# EAGLE board Combined MXP board - Copy (EAGLE 7.1.0)
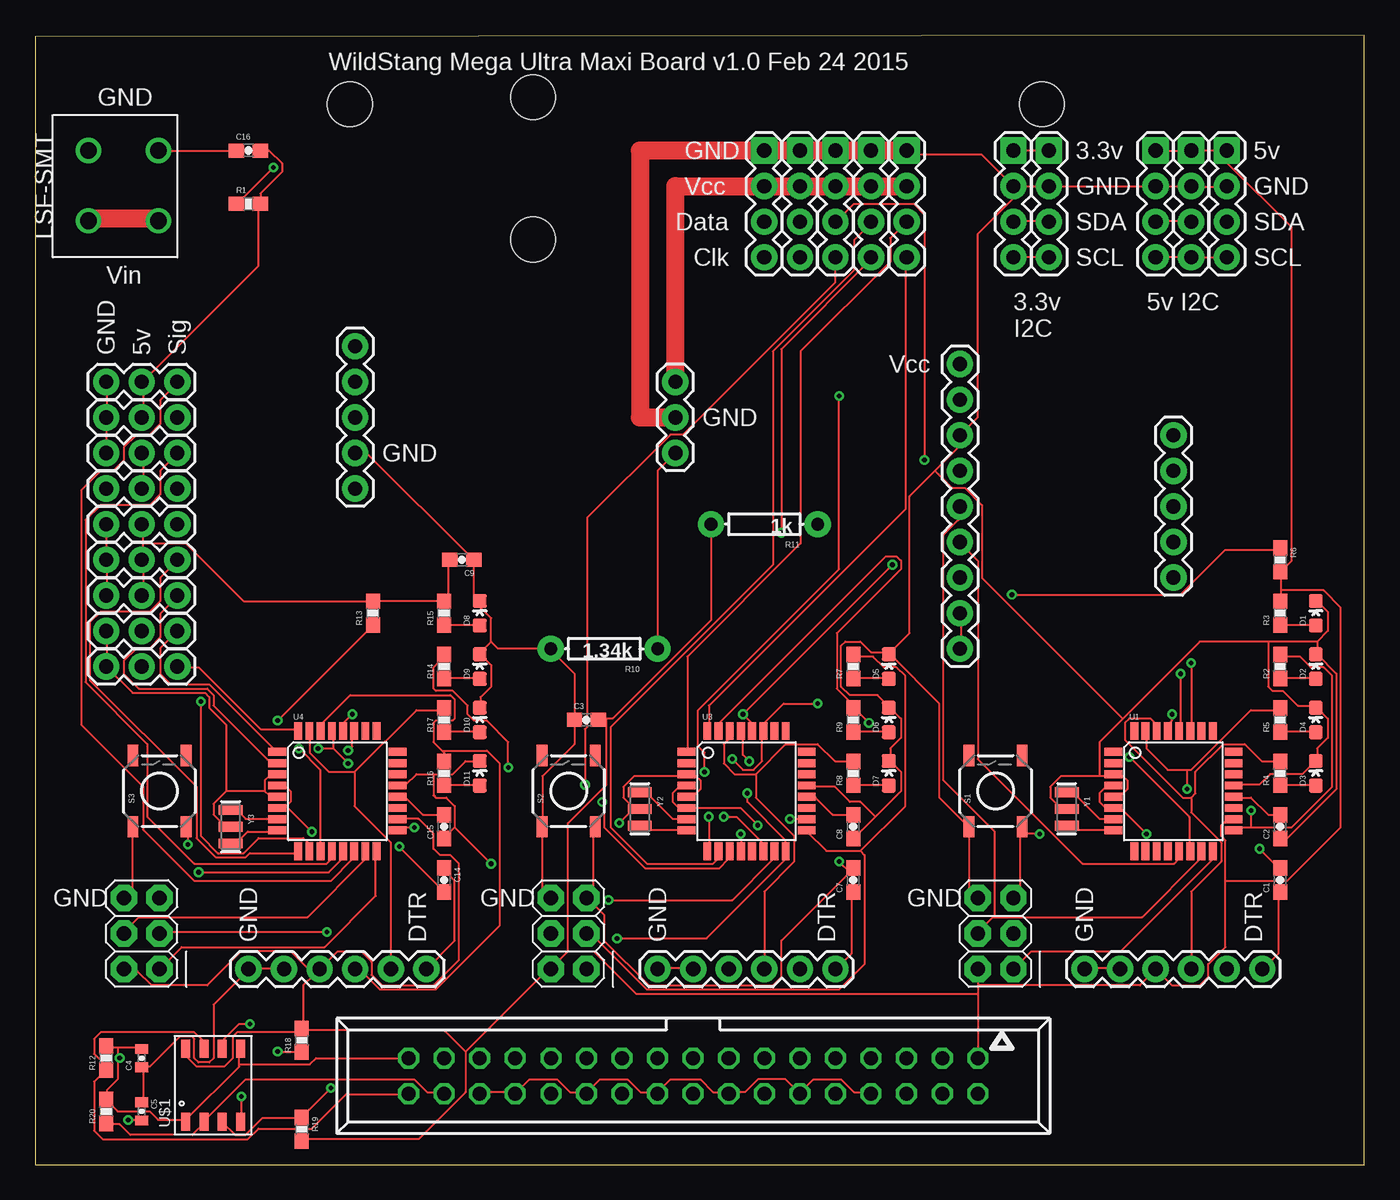
[diagram p0: board, top side]
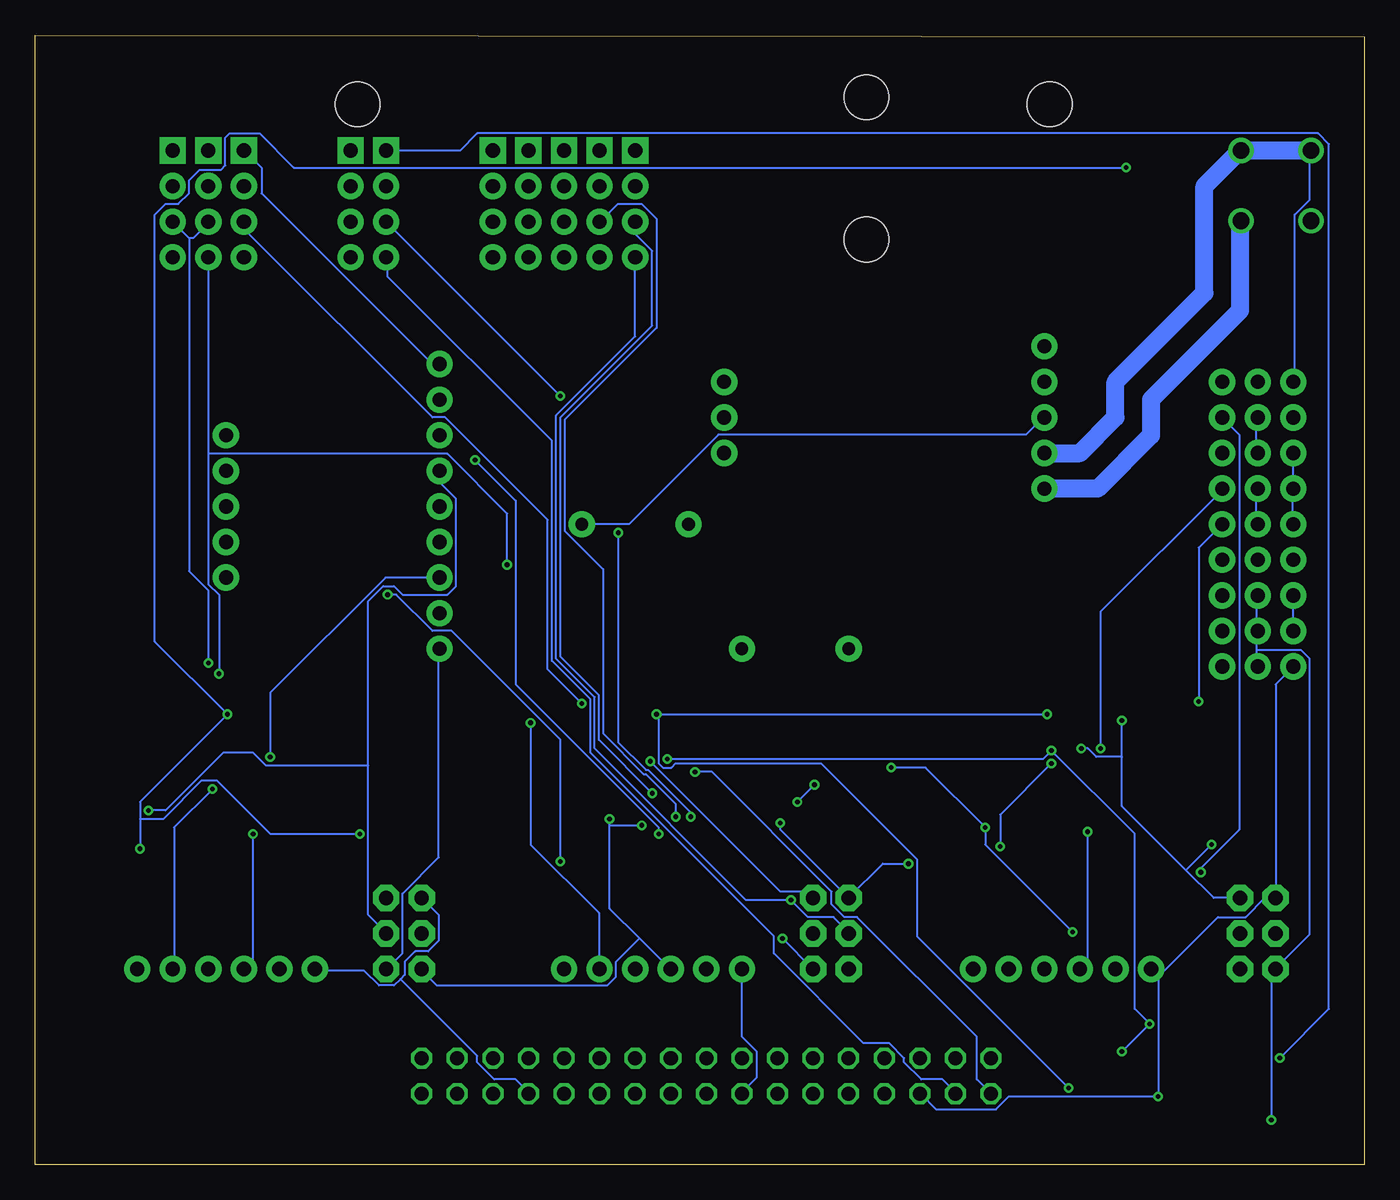
[diagram p1: board, bottom side, seen from below]

Size 94.92 x 80.64 mm. Coordinates in mm from the lower left corner, seen from the top.
Outline: 0,0 94.92,0 94.92,80.64 0,80.51 0,0
Copper layers (1*16): Top 0.0356mm / dielectric 1.5011mm / Bottom 0.0356mm
Design rules "LaenPCBOrder": minimum track width 6mil, minimum drill 13mil, track to track 6mil, track to pad 6mil, pad to pad 6mil, via to via 6mil, smd to smd 6mil, copper to edge 15mil, drill to drill 6mil, minimum pad ring 7mil, minimum via ring 7mil, stop-mask expansion 3mil, vias tented up to drill 0mil, thermal gap 10mil
Holes 3.2 mm at 22.48,75.69 71.88,75.69 35.56,66.04 35.56,76.2

## Footprints (pad centres in the part's own frame; a part is rotated, then mirrored left to right if it is on the bottom)
1X03 = drill 1.016 pad 1.88: 1 0,0; 2 2.54,0; 3 5.08,0
0603-CAP = smd 1.1 x 1: 1 -0.85,0; 2 0.85,0
0402-CAP = smd 0.7 x 0.9: 1 -0.65,0; 2 0.65,0
LED-0603 = smd 1 x 1: A 0,-0.877; C 0,0.877
1X06 = drill 1.016 pad 1.88: 1 0,0; 2 2.54,0; 3 5.08,0; 4 7.62,0; 5 10.16,0; 6 12.7,0
1X04 = drill 1.016 pad 1.88 square: 1 0,0 | drill 1.016 pad 1.88: 2 2.54,0; 3 5.08,0; 4 7.62,0
2X03 = drill 1.016 pad 1.88 octagon: 1 -2.54,-1.27; 2 -2.54,1.27; 3 0,-1.27; 4 0,1.27; 5 2.54,-1.27; 6 2.54,1.27
1X09 = drill 1.016 pad 1.88: 1 0,0; 2 2.54,0; 3 5.08,0; 4 7.62,0; 5 10.16,0; 6 12.7,0; 7 15.24,0; 8 17.78,0; 9 20.32,0
1X05 = drill 1.016 pad 1.88: 1 0,0; 2 2.54,0; 3 5.08,0; 4 7.62,0; 5 10.16,0
0603-RES = smd 1.1 x 1: 1 -0.85,0; 2 0.85,0
AXIAL-0.3 = drill 0.9 pad 1.88: P$1 -3.81,0; P$2 3.81,0
TACTILE_SWITCH_SMD = smd 1.524 x 0.762: 1 -2.54,1.905; 2 2.54,1.905; 3 -2.54,-1.905; 4 2.54,-1.905
TQFP32-08 = smd 1.27 x 0.559: 1 -4.293,2.8; 2 -4.293,2; 3 -4.293,1.2; 4 -4.293,0.4; 5 -4.293,-0.4; 6 -4.293,-1.2; 7 -4.293,-2; 8 -4.293,-2.8; 17 4.293,-2.8; 18 4.293,-2; 19 4.293,-1.2; 20 4.293,-0.4; 21 4.293,0.4; 22 4.293,1.2; 23 4.293,2; 24 4.293,2.8 | smd 0.559 x 1.27: 9 -2.8,-4.293; 10 -2,-4.293; 11 -1.2,-4.293; 12 -0.4,-4.293; 13 0.4,-4.293; 14 1.2,-4.293; 15 2,-4.293; 16 2.8,-4.293; 25 2.8,4.293; 26 2,4.293; 27 1.2,4.293; 28 0.4,4.293; 29 -0.4,4.293; 30 -1.2,4.293; 31 -2,4.293; 32 -2.8,4.293
PCA9512A = smd 1.27 x 0.635: ACC 3.2,-0.7; GND -2,-0.7; SCLIN -2,0.6; SCLOUT -2,1.9; SDAIN 3.2,0.6; SDAOUT 3.2,1.9; VCCH 3.2,3.2; VCCL -2,3.2
LSF-SMT = drill 1.199: 1 0,5.004; 1-2 0,0; 2 5.004,5.004; 2-2 5.004,0
057-034-1 = drill 1 octagon: 1 -20.32,-1.27; 2 -20.32,1.27; 3 -17.78,-1.27; 4 -17.78,1.27; 5 -15.24,-1.27; 6 -15.24,1.27; 7 -12.7,-1.27; 8 -12.7,1.27; 9 -10.16,-1.27; 10 -10.16,1.27; 11 -7.62,-1.27; 12 -7.62,1.27; 13 -5.08,-1.27; 14 -5.08,1.27; 15 -2.54,-1.27; 16 -2.54,1.27; 17 0,-1.27; 18 0,1.27; 19 2.54,-1.27; 20 2.54,1.27; 21 5.08,-1.27; 22 5.08,1.27; 23 7.62,-1.27; 24 7.62,1.27; 25 10.16,-1.27; 26 10.16,1.27; 27 12.7,-1.27; 28 12.7,1.27; 29 15.24,-1.27; 30 15.24,1.27; 31 17.78,-1.27; 32 17.78,1.27; 33 20.32,-1.27; 34 20.32,1.27
RESONATOR-SMD = smd 0.7 x 1.7: 1 -1.2,0; 2 0,0; 3 1.2,0

## Placement (x,y rotation side)
2  [1X03]  10.16,35.56 180 top
3  [1X03]  10.16,38.1 180 top
4  [1X03]  10.16,40.64 180 top
5  [1X03]  10.16,43.18 180 top
6  [1X03]  10.16,45.72 180 top
7  [1X03]  10.16,48.26 180 top
8  [1X03]  10.16,50.8 180 top
9  [1X03]  10.16,53.34 180 top
10  [1X03]  10.16,55.88 180 top
C1  0.1uF  [0603-CAP]  88.9,20.32 90 top
C2  0.1uF  [0603-CAP]  88.9,24.13 90 top
C3  0.1uF  [0603-CAP]  39.37,31.75 0 top
C4  [0402-CAP]  7.62,7.62 90 top
C5  [0402-CAP]  7.62,3.81 270 top
C7  0.1uF  [0603-CAP]  58.42,20.32 90 top
C8  0.1uF  [0603-CAP]  58.42,24.13 90 top
C9  0.1uF  [0603-CAP]  30.48,43.18 180 top
C14  0.1uF  [0603-CAP]  29.21,20.32 270 top
C15  0.1uF  [0603-CAP]  29.21,24.13 90 top
C16  0.1uF  [0603-CAP]  15.24,72.39 0 top
D1  Power  [LED-0603]  91.44,39.37 0 top
D2  D13  [LED-0603]  91.44,35.56 0 top
D3  RX  [LED-0603]  91.44,27.94 0 top
D4  TX  [LED-0603]  91.44,31.75 0 top
D5  D13  [LED-0603]  60.96,35.56 0 top
D6  TX  [LED-0603]  60.96,31.75 0 top
D7  RX  [LED-0603]  60.96,27.94 0 top
D8  Power  [LED-0603]  31.75,39.37 0 top
D9  D13  [LED-0603]  31.75,35.56 0 top
D10  TX  [LED-0603]  31.75,31.75 0 top
D11  RX  [LED-0603]  31.75,27.94 0 top
JP1  FTDI Basic  [1X06]  87.63,13.97 180 top
JP2  [1X04]  80.01,72.39 270 top
JP3  ICSP  [2X03]  68.58,16.51 90 top
JP4  [1X04]  72.39,72.39 270 top
JP5  [1X04]  69.85,72.39 270 top
JP6  [1X04]  85.09,72.39 270 top
JP7  M09  [1X09]  66.04,57.15 270 top
JP8  [1X05]  81.28,52.07 270 top
JP9  [1X04]  82.55,72.39 270 top
JP10  FTDI Basic  [1X06]  57.15,13.97 180 top
JP11  ICSP  [2X03]  38.1,16.51 90 top
JP13  [1X05]  22.86,58.42 270 top
JP15  [1X04]  62.23,72.39 270 top
JP16  [1X04]  59.69,72.39 270 top
JP17  [1X04]  57.15,72.39 270 top
JP18  [1X04]  54.61,72.39 270 top
JP19  [1X04]  52.07,72.39 270 top
JP20  [1X03]  45.72,55.88 270 top
JP21  FTDI Basic  [1X06]  27.94,13.97 180 top
JP22  ICSP  [2X03]  7.62,16.51 90 top
R1  10k  [0603-RES]  15.24,68.58 0 top
R2  10k  [0603-RES]  88.9,35.56 90 top
R3  10k  [0603-RES]  88.9,39.37 90 top
R4  10k  [0603-RES]  88.9,27.94 90 top
R5  10k  [0603-RES]  88.9,31.75 90 top
R6  10k  [0603-RES]  88.9,43.18 270 top
R7  10k  [0603-RES]  58.42,35.56 90 top
R8  10k  [0603-RES]  58.42,27.94 90 top
R9  10k  [0603-RES]  58.42,31.75 90 top
R10  1.34k  [AXIAL-0.3]  40.64,36.83 180 top
R11  1k  [AXIAL-0.3]  52.07,45.72 180 top
R12  10k  [0603-RES]  5.08,7.62 90 top
R13  10k  [0603-RES]  24.13,39.37 90 top
R14  10k  [0603-RES]  29.21,35.56 90 top
R15  10k  [0603-RES]  29.21,39.37 90 top
R16  10k  [0603-RES]  29.21,27.94 90 top
R17  10k  [0603-RES]  29.21,31.75 90 top
R18  10k  [0603-RES]  19.05,8.89 90 top
R19  10k  [0603-RES]  19.05,2.54 270 top
R20  10k  [0603-RES]  5.08,3.81 90 top
S1  Reset  [TACTILE_SWITCH_SMD]  68.58,26.67 90 top
S2  Reset  [TACTILE_SWITCH_SMD]  38.1,26.67 90 top
S3  Reset  [TACTILE_SWITCH_SMD]  8.89,26.67 90 top
U1  ATMEGA328P  [TQFP32-08]  81.28,26.67 0 top
U3  ATMEGA328P  [TQFP32-08]  50.8,26.67 0 top
U4  ATMEGA328P  [TQFP32-08]  21.59,26.67 0 top
U$1  PCA9512A  [PCA9512A]  13.97,5.08 90 top
U$2  LSF-SMT  [LSF-SMT]  3.81,72.39 270 top
X1  057-034-1  [057-034-1]  46.99,6.35 180 top
Y1  16MHz  [RESONATOR-SMD]  73.66,25.4 270 top
Y2  16MHz  [RESONATOR-SMD]  43.18,25.4 270 top
Y3  16MHz  [RESONATOR-SMD]  13.97,24.13 270 top

## Library data of the parts
2-10 JP1-JP11 JP13 JP15-JP22 = SparkFun-Connectors
C1-C3 C7-C9 C14-C16 R1-R9 R12-R20 = SparkFun-Passives
C4 C5 = SparkFun-Capacitors
D1 D2 D4-D6 D8-D10 = SparkFun-LED; PROD_ID: DIO-00819
D3 D7 D11 = SparkFun-LED; PROD_ID: DIO-00821
R10 R11 = SparkFun-Resistors
S1-S3 = SparkFun-Electromechanical; PROD_ID: SWCH-08247
U1 U3 U4 = SparkFun-DigitalIC; PROD_ID: IC-09069
U$1 = TPS5430
U$2 = LSF-SMT
X1 = con-panduit; OC_FARNELL: unknown; OC_NEWARK: unknown
Y1-Y3 = SparkFun-FreqCtrl; PROD_ID: XTAL-08900

## Nets
3V3: JP7.2
A0: U1.23
A1: U1.24
A2: U1.25
A3: U1.26
A6: U1.19
A7: U1.22
AREF: C2.2 U1.20
D2: U1.32
D3: U1.1
D4: U1.2
D5: U1.9
D6: U1.10
D7: U1.11
D8: U1.12
D9: JP7.6 U1.13
D10: JP7.7 U1.14
DTR: C1.1 JP1.1
GND: 2.3 3.3 4.3 5.3 6.3 7.3 8.3 9.3 10.3 C2.1 C3.1 C4.1 C5.1 C8.1 C9.1 C15.1 C16.1 D1.C D2.C D3.C D4.C D5.C D6.C D7.C D8.C D9.C D10.C D11.C JP1.5 JP1.6 JP2.2 JP3.6 JP4.2 JP5.2 JP6.2 JP7.3 JP9.2 JP10.5 JP10.6 JP11.6 JP13.4 JP15.1 JP16.1 JP17.1 JP18.1 JP19.1 JP20.2 JP21.5 JP21.6 JP22.6 R10.P$2 S1.1 S2.1 S3.1 U1.3 U1.5 U1.21 U3.3 U3.5 U3.21 U4.3 U4.5 U4.21 U$1.GND U$2.1 U$2.1-2 X1.8 X1.12 X1.16 X1.20 X1.24 X1.28 X1.30 Y1.2 Y2.2 Y3.2
HE-A0: U4.23
HE-A1: U4.24
HE-A2: U4.25
HE-A3: U4.26
HE-A6: U4.19
HE-A7: U4.22
HE-AREF: C15.2 U4.20
HE-D2: 2.1 U4.32
HE-D3: 3.1 U4.1
HE-D4: 4.1 U4.2
HE-D5: 5.1 U4.9
HE-D6: 6.1 U4.10
HE-D7: 7.1 U4.11
HE-D8: 8.1 U4.12
HE-D9: 9.1 U4.13
HE-D10: 10.1 U4.14
HE-DTR: C14.1 JP21.1
HE-MISO: JP22.1 U4.16
HE-MOSI: JP22.4 U4.15
HE-RESET: C14.2 JP22.5 R13.1 S3.3 U4.29
HE-RXI: JP21.3 R16.2 U4.30
HE-SCK: JP22.3 R14.2 U4.17
HE-TXO: JP21.2 R17.2 U4.31
LED-A1: U3.24
LED-A2: U3.25
LED-A3: U3.26
LED-A6: U3.19
LED-A7: U3.22
LED-AREF: C8.2 U3.20
LED-D2: JP15.4 U3.32
LED-D3: JP15.3 U3.1
LED-D5: JP16.4 U3.9
LED-D6: JP16.3 U3.10
LED-D7: JP17.4 U3.11
LED-D8: JP17.3 U3.12
LED-D9: JP18.4
LED-D10: JP18.3 U3.14
LED-DTR: C7.1 JP10.1
LED-MISO: JP11.1 JP19.3 U3.16
LED-MOSI: JP11.4 JP19.4 U3.15
LED-RESET: C7.2 JP11.5 R6.1 S2.3 U3.29
LED-RXI: JP10.3 R8.2 U3.30
LED-SCK: JP11.3 R7.2 U3.17
LED-TXO: JP10.2 R9.2 U3.31
LED-VCC: JP15.2 JP16.2 JP17.2 JP18.2 JP19.2 JP20.1
MISO: JP3.1 JP7.8 JP7.9 U1.16
MOSI: JP3.4 JP7.5 U1.15
N$1: U1.7 Y1.1
N$2: U1.8 Y1.3
N$3: D1.A R3.1
N$4: D2.A R2.1
N$5: D3.A R4.1
N$6: D4.A R5.1
N$7: U3.7 Y2.1
N$8: U3.8 Y2.3
N$9: D5.A R7.1
N$10: D6.A R9.1
N$11: D7.A R8.1
N$12: JP20.3 R10.P$1
N$13: U3.13
N$14: JP13.3 R11.P$1
N$19: U4.7 Y3.1
N$20: U4.8 Y3.3
N$21: D8.A R15.1
N$22: D9.A R14.1
N$23: D10.A R17.1
N$24: D11.A R16.1
RESET: C1.2 JP3.5 R1.1 S1.3 U1.29
RXI: JP1.3 R4.2 U1.30
SCK: JP3.3 JP7.4 R2.2 U1.17
SCL: JP2.4 JP6.4 JP9.4 R19.1 U1.28 U3.28 U4.28 U$1.SCLIN
SCL3.3: JP4.4 JP5.4 R20.1 U$1.SCLOUT X1.32
SDA: JP2.3 JP6.3 JP9.3 R18.1 U1.27 U3.27 U4.27 U$1.SDAIN
SDA3.3: JP4.3 JP5.3 R12.1 U$1.SDAOUT X1.34
TXO: JP1.2 R5.2 U1.31
VCC: 2.2 3.2 4.2 5.2 6.2 7.2 8.2 9.2 10.2 C3.2 C5.2 C9.2 C16.2 JP1.4 JP2.1 JP3.2 JP6.1 JP7.1 JP9.1 JP10.4 JP11.2 JP21.4 JP22.2 R1.2 R3.2 R6.2 R11.P$2 R13.2 R15.2 R18.2 R19.2 U1.4 U1.6 U1.18 U3.4 U3.6 U3.18 U4.4 U4.6 U4.18 U$1.VCCH X1.1
VCC3.3: C4.2 JP4.1 JP5.1 R12.2 R20.2 U$1.ACC U$1.VCCL X1.33
VIN: JP13.5 U$2.2 U$2.2-2

## Tracks (layer width: path | path; a pad name or v marks a point on that pad's centre or on a via)
AREF
  Top 0.152: C2.2 88.8,24.99 88.04,24.99 86.82,26.21 85.6,26.21 U1.20
D9
  Top 0.152: U1.13 81.64,22.25 81.64,21.79 81.33,21.49 74.78,21.49 67.31,28.96 67.31,43.13 66.09,44.35 JP7.6
D10  (via drill 0.33)
  Top 0.152: v78.13,29.11 82.4,24.84 82.4,22.4 U1.14
  Bottom 0.152: v78.13,29.11 78.13,33.68 69.9,41.91 JP7.7
DTR
  Top 0.152: C1.1 88.8,19.36 88.8,15.09 87.73,14.02 JP1.1
GND  (via drill 0.33)
  Top 0.152: JP5.2 69.9,69.8 72.34,69.8 JP4.2 72.49,69.8 79.96,69.8 JP2.2 80.11,69.8 82.55,69.8 | 82.55,69.8 84.99,69.8 JP6.2 | 82.55,69.8 JP9.2 | JP5.2 67.61,72.08 62.74,72.08 JP15.1 | 28.45,27.89 27.23,27.89 26.47,27.13 26.01,27.13 U4.21 | 28.45,27.89 29.82,27.89 30.73,28.8 31.65,28.8 D11.C | 29.97,24.08 29.21,23.32 C15.1 | 29.97,24.08 29.97,25.6 29.36,26.21 28.6,26.21 28.45,26.36 28.45,27.89 | U3.5 46.58,26.36 47.04,26.36 47.5,26.82 47.5,27.43 47.19,27.74 46.58,27.74 U3.3 46.43,27.74 42.77,27.74 42.01,26.98 42.01,26.21 42.77,25.45 | 42.77,25.45 43.08,25.45 Y2.2 42.77,25.45 | JP11.6 36.22,19.66 36.22,24.08 S2.1 36.22,24.23 36.22,27.74 38.51,30.02 38.51,31.7 C3.1 38.51,31.85 38.51,35.05 36.83,36.73 R10.P$2 36.83,36.88 33.02,36.88 32.56,37.34 | v41.71,24.38 42.77,25.45 | v32.56,21.49 29.97,24.08 | D10.C 31.8,32.77 31.8,33.38 32.56,34.14 32.56,35.66 31.8,36.42 D9.C 31.8,36.58 32.56,37.34 | 32.56,37.34 32.56,39.01 31.8,39.78 31.8,40.23 D8.C 31.65,40.39 31.34,40.69 31.34,43.13 C9.1 31.19,43.28 23.72,50.75 22.96,50.75 JP13.4 | JP22.6 6.96,19.66 6.96,24.08 S3.1 | C5.1 7.72,4.57 7.72,6.86 C4.1 7.72,7.01 8.18,7.01 10.31,9.14 11.23,9.14 11.38,8.99 11.38,7.62 11.68,7.32 12.45,7.32 12.75,7.62 12.75,11.43 15.19,13.87 JP21.6 15.34,14.02 17.78,14.02 JP21.5 | v14.73,4.88 14.73,3.2 U$1.GND | 16.41,26.67 16.71,26.36 17.17,26.36 U4.5 | 16.41,26.67 16.41,27.43 16.71,27.74 17.17,27.74 U4.3 | 13.67,26.67 12.75,25.76 12.75,24.99 13.51,24.23 13.97,24.23 Y3.2 | 16.41,26.67 13.67,26.67 | 3.3 5.13,38.1 5.13,35.66 2.3 6.96,33.68 12.14,33.68 12.45,33.38 12.45,32.61 13.67,31.39 13.67,26.67
  Top 0.152: U$2.1 C16.1 | 5.13,53.34 5.13,55.78 10.3 | 4.3 5.13,40.69 5.13,43.13 5.3 5.13,43.28 5.13,45.72 6.3 | 5.13,53.34 5.13,50.9 8.3 | 5.13,53.34 9.3 | U1.21 85.6,27.13 87.43,27.13 88.19,27.89 90.48,27.89 91.39,28.8 D3.C 91.54,28.96 91.54,29.72 92.3,30.48 92.3,31.85 91.54,32.61 D4.C 91.39,32.77 90.17,32.77 89.1,33.83 88.34,33.83 88.04,34.14 88.04,37.34 | U1.5 77.06,26.36 77.52,26.36 77.98,26.82 77.98,27.43 77.67,27.74 77.06,27.74 U1.3 76.91,27.74 76,27.74 | 76,27.74 73.25,27.74 72.49,26.98 72.49,26.21 73.25,25.45 73.56,25.45 Y1.2 | 91.54,37.34 91.54,36.58 D2.C 91.54,36.42 92.91,35.05 92.91,26.82 89.41,23.32 88.95,23.32 C2.1 | 91.54,37.34 92.3,38.1 92.3,39.47 91.54,40.23 D1.C | 76,27.74 76,30.18 77.67,31.85 | 77.67,31.85 83.16,37.34 88.04,37.34 | 91.54,37.34 88.04,37.34 | D5.C 60.91,36.58 59.69,36.58 58.93,37.34 57.86,37.34 57.56,37.03 57.56,34.14 58.17,33.53 60.15,33.53 60.91,32.77 D6.C 61.06,32.61 61.82,31.85 61.82,30.48 61.06,29.72 61.06,28.96 D7.C 61.06,28.8 61.82,28.04 61.82,26.67 60,24.84 | 60,24.84 58.47,23.32 C8.1 | 60,24.84 58.93,25.91 58.17,25.91 57.1,26.98 55.12,26.98 U3.21 | 64.26,49.53 62.43,47.7 62.43,37.95 61.06,36.58 D5.C | 64.26,49.53 65.94,51.21 65.94,51.97 JP7.3 67.31,53.34 67.31,66.45 69.75,68.89 69.75,69.8 JP5.2 | 77.67,31.85 67.61,41.91 67.61,47.09 66.4,48.31 65.48,48.31 64.26,49.53 | JP1.6 74.93,14.02 77.37,14.02 JP1.5 | JP3.6 66.7,19.66 66.7,24.08 S1.1 66.55,24.23 64.57,26.21 64.57,32.92 61.06,36.42 D5.C | X1.8 59.69,5.18 58.47,5.18 57.56,6.1 55.58,6.1 54.66,5.18 X1.12 53.59,6.1 51.61,6.1 50.7,5.18 49.63,5.18 X1.16 49.48,5.18 48.41,5.18 47.5,6.1 45.36,6.1 44.45,5.18
  Top 0.152: JP10.6 44.45,14.02 46.89,14.02 JP10.5 | X1.30 31.8,5.18 34.24,5.18 X1.28 35.31,6.1 37.29,6.1 38.2,5.18 39.27,5.18 X1.24 39.42,5.18 40.34,6.1 42.32,6.1 43.23,5.18 44.45,5.18 | 44.45,5.18 X1.20
  Top 1.27: JP15.1 JP16.1 JP17.1 JP18.1 JP19.1 43.18,72.39 43.18,53.34 JP20.2
  Bottom 0.152: v41.71,24.38 41.71,23.93 JP11.6 34.39,21.49 v32.56,21.49 | 14.73,13.41 v14.73,4.88 25.4,4.88 26.31,3.96 30.58,3.96 31.65,5.03 X1.30 | 14.73,13.41 15.19,13.87 JP21.6 14.73,13.41 | 14.73,13.41 10.46,17.68 8.48,17.68 7.11,19.05 JP22.6 6.35,34.29 2.3 | 8.3 5.13,50.75 5.13,48.31 7.3 5.13,48.16 5.13,45.72 6.3 | U$2.1-2 3.91,72.39 3.91,68.89 4.98,67.82 4.98,55.93 10.3 | 3.3 5.13,38.1 5.13,40.54 4.3 | 68.83,13.26 68.53,13.56 68.53,14.48 67.77,15.24 66.85,15.24 66.09,16 66.09,17.83 JP3.6 | 68.83,13.26 69.29,12.8 70.36,12.8 71.42,13.87 74.93,13.87 JP1.6 | JP10.6 44.45,9.14 43.38,8.08 43.38,6.25 44.45,5.18 X1.20 | 68.83,13.26 63.35,7.77 63.35,7.32 62.13,6.1 60.6,6.1 59.69,5.18 X1.8
  Bottom 1.27: 3.91,72.39 U$2.1 8.89,72.39 11.43,69.85 11.43,62.23 17.78,55.88 17.78,53.34 20.32,50.8 JP13.4
HE-AREF
  Top 0.152: C15.2 29.21,24.99 27.69,24.99 26.47,26.21 26.01,26.21 U4.20
HE-D2
  Top 0.152: U4.32 18.69,31.09 16.1,31.09 11.68,35.51 10.16,35.51 2.1
HE-D3
  Top 0.152: 3.1 8.94,36.88 8.94,35.05 9.7,34.29 12.45,34.29 17.17,29.57 U4.1
HE-D4
  Top 0.152: U4.2 17.17,28.8 16.71,28.8 12.75,32.77 12.75,33.53 12.29,33.98 7.42,33.98 6.35,35.05 6.35,35.97 7.26,36.88 8.18,36.88 8.94,37.64 8.94,39.32 10.16,40.54 4.1
HE-D5
  Top 0.152: U4.9 18.69,22.25 15.34,22.25 15.04,21.95 12.9,21.95 11.53,23.32 11.53,26.98 3.91,34.59 3.91,38.71 4.67,39.47 8.18,39.47 8.94,40.23 8.94,41.91 10.16,43.13 5.1
HE-D6  (via drill 0.33)
  Top 0.152: v11.84,33.07 11.84,23.47 13.06,22.25 14.88,22.25 15.95,23.32 19.15,23.32 19.46,23.01 19.46,22.4 U4.10
  Bottom 0.152: v11.84,33.07 11.84,44.04 6.1
HE-D7  (via drill 0.33)
  Top 0.152: v18.85,29.72 20.37,28.19 20.37,22.4 U4.11
  Bottom 0.152: v18.85,29.72 18.85,39.47 10.16,48.16 7.1
HE-D8
  Top 0.152: U4.12 21.13,22.25 21.13,21.79 20.83,21.49 11.38,21.49 8.03,24.84 8.03,30.02 3.61,34.44 3.61,46.02 4.67,47.09 8.18,47.09 8.94,47.85 8.94,49.53 10.16,50.75 8.1
HE-D9  (via drill 0.33)
  Top 0.152: v11.68,20.88 20.98,20.88 21.9,21.79 21.9,22.25 U4.13
  Bottom 0.152: v11.68,20.88 11.68,21.18 8.94,23.93 8.94,52.12 9.1
HE-D10
  Top 0.152: U4.14 22.66,22.25 22.66,21.79 21.13,20.27 11.38,20.27 7.72,23.93 7.72,26.98 3.3,31.39 3.3,48.16 4.67,49.53 5.59,49.53 6.35,50.29 6.35,51.21 7.26,52.12 8.18,52.12 8.94,52.88 8.94,54.56 10.16,55.78 10.1
HE-DTR
  Top 0.152: JP21.1 29.97,16 29.97,20.27 29.21,21.03 C14.1
HE-MISO
  Top 0.152: JP22.1 10.46,15.54 20.68,15.54 24.33,19.2 24.33,22.25 U4.16
HE-MOSI
  Top 0.152: U4.15 23.57,22.25 23.57,21.79 19.46,17.68 7.42,17.68 6.35,16.61 JP22.4
HE-RESET  (via drill 0.33)
  Top 0.152: v26.01,22.71 29.21,19.51 C14.2 | 21.28,29.72 v22.35,28.65 | 21.28,29.72 21.28,30.94 U4.29 | v17.32,31.7 24.03,38.41 R13.1 | v10.92,22.86 10.92,24.08 S3.3 | v20.22,29.72 21.28,29.72
  Bottom 0.152: v26.01,22.71 26.01,24.99 v22.35,28.65 | 17.32,29.11 17.32,25.6 12.75,21.03 | 17.32,29.11 v17.32,31.7 | 12.75,21.03 10.77,19.05 JP22.5 | 12.75,21.03 v10.92,22.86 | v20.22,29.72 19.76,29.72 19.15,29.11 17.32,29.11
HE-RXI
  Top 0.152: R16.2 29.21,29.41 29.06,29.57 | 29.06,29.57 28.45,30.18 28.45,31.55 28.6,31.7 29.82,31.7 29.97,31.85 29.97,33.22 29.67,33.53 22.5,33.53 20.52,31.55 20.52,31.09 U4.30 | 29.06,29.57 32.26,29.57 33.17,28.65 33.17,17.07 28.6,12.5 24.64,12.5 23.27,13.87 22.96,13.87 JP21.3
HE-SCK  (via drill 0.33)
  Top 0.152: v33.78,28.35 33.78,30.18 32.26,31.7 31.34,31.7 30.89,32.16 30.89,32.77 29.82,33.83 28.6,33.83 28.45,33.98 28.45,35.51 29.21,36.27 R14.2 | v27.08,24.08 26.16,24.08 26.01,23.93 U4.17 | v20.83,16.61 8.94,16.61 JP22.3
  Bottom 0.152: v33.78,28.35 31.34,28.35 v27.08,24.08 27.08,22.86 v20.83,16.61
HE-TXO
  Top 0.152: 22.81,28.04 27.23,32.46 29.21,32.46 R17.2 | 22.81,28.04 20.98,28.04 19.61,29.41 19.61,30.94 U4.31 | JP21.2 25.4,23.01 22.81,25.6 22.81,28.04
LED-AREF
  Top 0.152: C8.2 58.32,24.99 56.95,24.99 55.73,26.21 55.12,26.21 U3.20
LED-D2
  Top 0.152: U3.32 48.11,31.09 48.11,32.77 62.13,46.79 62.13,64.77 JP15.4
LED-D3
  Top 0.152: JP15.3 61.06,66.14 61.06,64.47 54.66,58.06 54.66,44.35 46.58,36.27 46.58,29.57 U3.1
LED-D5  (via drill 0.33)
  Top 0.152: v48.11,24.84 48.11,22.4 U3.9 | v53.29,45.11 53.29,58.22 59.69,64.62 JP16.4
  Bottom 0.152: v48.11,24.84 48.11,25.15 51.16,28.19 51.31,28.19 53.29,30.18 v53.29,45.11
LED-D6
  Top 0.152: U3.10 48.72,22.25 48.72,21.79 48.41,21.49 43.69,21.49 41.1,24.08 41.1,31.24 52.68,42.82 52.68,58.06 58.47,63.86 58.47,65.99 59.69,67.21 JP16.3
LED-D7  (via drill 0.33)
  Top 0.152: v40.49,25.91 40.64,25.76 40.64,24.08 43.54,21.18 48.87,21.18 49.48,21.79 49.48,22.25 U3.11 | v39.27,27.13 39.27,31.09 39.42,31.24 39.42,46.18 45.36,52.12 46.28,52.12 57.1,62.94 57.1,64.77 JP17.4
  Bottom 0.152: v39.27,27.13 v40.49,25.91
LED-D8  (via drill 0.33)
  Top 0.152: v50.39,23.62 50.39,22.4 U3.12 | v63.5,50.29 63.5,67.82 62.74,68.58 58.47,68.58 57.25,67.36 JP17.3
  Bottom 0.152: v50.39,23.62 50.39,24.08 60.6,34.29 60.6,47.4 v63.5,50.29
LED-D10  (via drill 0.33)
  Top 0.152: v49.17,24.84 50.09,24.84 51.92,23.01 51.92,22.4 U3.14
  Bottom 0.152: v49.17,24.84 49.17,25.76 51.31,27.89 51.46,27.89 54.36,30.79 54.36,42.52 57.1,45.26 57.1,53.19 50.55,59.74 50.55,67.51 51.61,68.58 53.29,68.58 54.51,67.36 JP18.3
LED-DTR
  Top 0.152: C7.1 58.32,19.36 58.32,15.09 57.25,14.02 JP10.1
LED-MISO  (via drill 0.33)
  Top 0.152: v41.55,16.15 47.95,16.15 53.59,21.79 53.59,22.25 U3.16 53.59,22.4 53.59,23.16 50.85,25.91 v50.85,26.52
  Bottom 0.152: JP11.1 v41.55,16.15 | JP19.3 52.07,66.45 50.85,65.23 50.85,59.89 57.4,53.34 57.4,36.27 54.66,33.53 54.66,30.33 v50.85,26.52
LED-MOSI  (via drill 0.33)
  Top 0.152: v40.95,18.9 49.78,18.9 52.68,21.79 52.68,22.25 U3.15
  Bottom 0.152: JP11.4 36.83,16.61 37.9,17.68 39.73,17.68 v40.95,18.9 44.15,18.9 54.97,29.72 54.97,33.38 57.71,36.12 57.71,53.49 52.07,59.13 JP19.4
LED-RESET  (via drill 0.33)
  Top 0.152: v51,28.8 50.55,29.26 50.55,30.94 U3.29 | 58.17,20.88 53.29,16 53.29,13.41 52.68,12.8 43.84,12.8 40.64,16 40.64,17.83 39.42,19.05 | 58.17,20.88 58.32,21.03 C7.2 58.17,20.88 | v69.75,40.69 81.79,40.69 84.99,43.89 88.8,43.89 R6.1 | 58.17,20.88 v57.4,21.64 | 39.42,19.05 39.88,19.51 39.88,24.08 S2.3 | 39.42,19.05 JP11.5
  Bottom 0.152: v51,28.8 41.71,19.51 39.88,19.51 39.42,19.05 JP11.5 | v69.75,40.69 69.14,40.69 66.55,38.1 65.18,38.1 57.4,30.33 v57.4,21.64
LED-RXI
  Top 0.152: 51.46,27.89 53.59,30.02 55.88,30.02 57.1,28.8 58.32,28.8 R8.2 | 51.46,27.89 49.94,27.89 49.17,28.65 49.17,30.02 49.48,30.33 49.48,30.94 U3.30 | JP10.3 52.07,19.51 54.2,21.64 54.2,23.47 51.46,26.21 51.46,27.89
LED-SCK
  Top 0.152: 58.93,22.4 62.13,25.6 62.13,34.9 61.52,35.51 60.6,35.51 59.84,36.27 58.47,36.27 R7.2 | 58.93,22.4 56.49,22.4 55.12,23.77 U3.17 | 58.93,22.4 59.23,22.1 59.23,14.33 57.4,12.5 43.69,12.5 39.73,16.46 39.42,16.46 JP11.3
LED-TXO  (via drill 0.33)
  Top 0.152: U3.31 48.87,31.09 48.87,31.55 60.76,43.43 61.52,43.43 61.82,43.13 61.82,42.52 57.25,37.95 57.25,33.98 58.32,32.92 58.32,32.61 R9.2 58.47,32.61 v59.54,31.55
  Bottom 0.152: v59.54,31.55 59.54,22.86 54.66,17.98 54.66,14.02 JP10.2
LED-VCC
  Top 0.152: 52.07,69.8 JP19.2 | 54.51,69.85 54.51,69.8 JP18.2 | JP17.2 57.25,69.8 57.25,69.85 | 59.69,69.8 JP16.2
  Top 1.27: JP20.1 45.72,69.85 JP19.2 54.51,69.85 JP18.2 JP17.2 57.25,69.85 JP16.2 JP15.2
MISO
  Top 0.152: JP7.9 66.09,36.88 66.09,39.32 JP7.8 | JP3.1 71.12,15.24 77.52,15.24 84.07,21.79 84.07,22.25 U1.16
  Bottom 0.152: JP7.9 66.09,36.73 66.09,21.95 68.68,19.36 68.68,15.09 69.75,14.02 JP3.1
MOSI
  Top 0.152: 68.53,17.68 68.38,17.68 67.31,16.61 JP3.4 | 68.53,17.68 79.05,17.68 83.16,21.79 83.16,22.25 U1.15 | 68.53,17.68 68.53,23.77 64.87,27.43 64.87,44.96 65.94,46.02 65.94,46.94 JP7.5
N$1
  Top 0.152: U1.7 76.91,24.69 76,24.69 74.17,26.52 73.71,26.52 Y1.1
N$2
  Top 0.152: U1.8 76.91,23.93 73.86,23.93 73.71,24.08 Y1.3
N$3
  Top 0.152: D1.A 91.39,38.56 88.95,38.56 R3.1
N$4
  Top 0.152: D2.A 91.39,34.75 88.95,34.75 R2.1
N$5
  Top 0.152: D3.A 91.39,27.13 88.95,27.13 R4.1
N$6
  Top 0.152: D4.A 91.39,30.94 88.95,30.94 R5.1
N$7
  Top 0.152: U3.7 46.43,24.69 45.52,24.69 43.69,26.52 43.23,26.52 Y2.1
N$8
  Top 0.152: U3.8 46.43,23.93 43.38,23.93 43.23,24.08 Y2.3
N$9
  Top 0.152: D5.A 60.91,34.75 58.47,34.75 R7.1
N$10
  Top 0.152: D6.A 60.91,30.94 58.47,30.94 R9.1
N$11
  Top 0.152: D7.A 60.91,27.13 58.47,27.13 R8.1
N$12
  Top 0.152: R10.P$1 44.45,49.53 JP20.3
N$14
  Bottom 0.152: R11.P$1 52.53,45.72 46.13,52.12 24.18,52.12 22.96,53.34 JP13.3
N$19
  Top 0.152: U4.7 17.17,24.69 15.04,24.69 14.43,25.3 13.97,25.3 Y3.1
N$20
  Top 0.152: U4.8 17.17,23.77 15.19,23.77 14.43,23.01 13.97,23.01 Y3.3
N$21
  Top 0.152: D8.A 31.65,38.56 29.21,38.56 R15.1
N$22
  Top 0.152: D9.A 31.65,34.75 29.21,34.75 R14.1
N$23
  Top 0.152: D10.A 31.65,30.94 29.21,30.94 R17.1
N$24
  Top 0.152: D11.A 31.65,27.13 29.21,27.13 R16.1
RESET  (via drill 0.33)
  Top 0.152: 70.36,23.62 70.36,19.51 69.9,19.05 JP3.5 | 70.36,23.62 70.36,24.08 S1.3 70.36,23.62 | v17.02,71.17 14.43,68.58 R1.1 | v81.18,32.16 81.18,31.7 81.03,31.55 81.03,31.09 U1.29 | v87.43,22.55 88.8,21.18 C1.2 | v71.73,23.62 70.36,23.62
  Bottom 0.152: v17.02,71.17 76.45,71.17 78.89,73.61 81.03,73.61 81.33,73.3 81.33,71.32 81.64,71.02 83.16,71.02 83.92,70.26 83.92,69.34 84.68,68.58 85.6,68.58 86.36,67.82 86.36,37.34 v81.18,32.16 87.43,25.91 87.43,24.69 | 87.43,24.69 v87.43,22.55 | v71.73,23.62 78.13,23.62 81.94,27.43 83.01,27.43 85.75,24.69 87.43,24.69
RXI
  Top 0.152: 82.55,26.21 82.86,26.52 82.86,28.04 84.84,30.02 86.36,30.02 87.58,28.8 88.8,28.8 R4.2 | 82.55,26.21 81.94,26.21 77.83,30.33 77.83,31.55 78.13,31.85 79.65,31.85 79.96,31.55 79.96,31.09 U1.30 | JP1.3 82.55,19.51 84.68,21.64 84.68,23.01 82.55,25.15 82.55,26.21
SCK  (via drill 0.33)
  Top 0.152: 86.82,24.08 85.75,24.08 85.6,23.93 U1.17 | 86.82,24.08 89.71,24.08 92.61,26.98 92.61,34.9 92,35.51 91.08,35.51 90.32,36.27 88.95,36.27 R2.2 | v86.82,25.3 86.82,24.08
  Bottom 0.152: 71.12,28.5 71.12,17.83 69.9,16.61 JP3.3 | 71.12,28.5 71.12,40.23 70.05,41.3 69.29,41.3 68.68,40.69 65.48,40.69 64.87,41.3 64.87,47.55 65.94,48.62 65.94,49.53 JP7.4 | v86.82,25.3 85.6,25.3 81.48,29.41 79.35,29.41 78.44,28.5 71.12,28.5
SCL  (via drill 0.33)
  Top 0.152: U$1.SCLIN 13.36,3.05 14.28,2.13 15.04,2.13 16.26,3.35 19,3.35 R19.1 19.15,3.5 v21.13,5.49 | v81.79,35.05 81.79,31.09 U1.28 | JP2.4 JP9.4 JP6.4 | v22.66,32.16 22.05,31.55 22.05,31.09 U4.28 | U3.28 51.16,31.09 51.16,31.55 v50.55,32.16 v61.21,42.82
  Bottom 0.152: v81.79,35.05 81.79,40.69 82.55,41.45 82.55,50.75 | JP9.4 82.55,50.75 | 50.39,32.16 v22.66,32.16 | v21.13,5.49 31.95,16.31 31.95,21.79 38.81,28.65 49.17,28.65 49.48,28.35 50.09,28.35 50.39,28.65 50.39,32.16 | 50.39,32.16 v50.55,32.16 | 82.55,50.75 65.48,50.75 61.21,46.48 v61.21,42.82
SCL3.3
  Top 0.152: JP4.4 JP5.4 | R20.1 5.13,2.9 6.04,2.9 6.81,2.13 11.23,2.13 12.14,3.05 U$1.SCLOUT 12.14,3.2 15.04,6.1 27.08,6.1 27.99,5.18 29.21,5.18 X1.32
  Bottom 0.152: JP5.4 69.75,64.77 69.75,63.4 58.01,51.66 58.01,35.97 55.27,33.22 55.27,29.41 42.16,16.31 42.16,15.09 35.76,8.69 33.93,8.69 32.87,7.62 32.87,7.32 31.65,6.1 30.12,6.1 29.21,5.18 X1.32
SDA  (via drill 0.33)
  Top 0.152: JP2.3 80.11,67.36 82.55,67.36 JP9.3 | v17.32,8.08 19,8.08 R18.1 | v15.34,10.06 14.58,10.06 13.51,8.99 13.51,8.38 U$1.SDAIN | v22.35,29.57 22.66,29.87 22.66,30.94 U4.27 | v49.78,28.96 50.55,28.19 51.31,28.19 51.92,28.8 51.92,30.94 U3.27 52.07,31.09 52.07,31.55 53.44,32.92 v55.88,32.92 | v82.55,35.81 82.55,31.09 U1.27
  Bottom 0.152: v17.32,8.08 v15.34,10.06 16.41,11.12 16.41,23.62 v22.35,29.57 22.96,28.96 v49.78,28.96 | v55.88,32.92 58.32,35.36 58.32,46.02 65.63,53.34 66.55,53.34 79.96,66.75 79.96,67.21 JP2.3 | v82.55,35.81 82.55,41 83.92,42.37 83.92,66.14 | JP6.3 83.92,66.14 | 83.92,66.14 83.62,66.14 82.55,67.21 JP9.3
SDA3.3  (via drill 0.33)
  Top 0.152: JP5.3 69.9,67.36 72.34,67.36 JP4.3 | U$1.SDAOUT 11.99,8.38 11.99,8.84 11.38,9.45 4.67,9.45 4.22,8.99 4.22,7.92 4.98,7.16 4.98,6.86 R12.1 4.98,6.71 4.22,5.94 4.22,2.44 4.83,1.83 15.19,1.83 15.95,2.59 19.76,2.59 22.2,5.03 26.62,5.03 X1.34 | v57.4,54.86 57.4,42.52 47.35,32.46 47.35,29.87 47.8,29.41 v47.8,28.04
  Bottom 0.152: v57.4,54.86 JP5.3 | v47.8,28.04 46.58,28.04 38.05,19.51 38.05,18.59 37.14,17.68 36.22,17.68 27.69,9.14 27.69,6.1 X1.34
TXO  (via drill 0.33)
  Top 0.152: 82.25,28.19 80.87,28.19 79.35,29.72 79.35,30.94 U1.31 | 82.25,28.19 82.55,28.19 86.82,32.46 88.8,32.46 R5.2 | 82.25,28.19 v82.25,26.82
  Bottom 0.152: v82.25,26.82 84.99,24.08 84.99,14.02 JP1.2
VCC  (via drill 0.33)
  Top 0.152: U3.4 46.43,26.98 45.97,26.98 45.52,26.52 45.52,25.91 45.82,25.6 46.43,25.6 U3.6 46.58,25.45 50.39,25.45 v51.61,24.23 | v53.9,24.69 54.97,24.69 U3.18 | JP3.2 67.31,12.8 | 67.31,12.8 67.31,12.19 | 67.31,12.19 X1.1 | U1.4 76.91,26.98 76.45,26.98 76,26.52 76,25.91 76.3,25.6 76.91,25.6 U1.6 77.06,25.45 77.52,25.45 v79.35,23.62 | 88.95,41 88.95,42.22 R6.2 88.95,42.37 89.71,43.13 89.71,66.9 85.14,71.48 85.14,72.39 JP6.1 JP9.1 JP2.1 | 88.95,41 88.95,40.23 R3.2 | 84.99,20.27 84.99,15.54 83.77,14.33 83.77,13.41 83.16,12.8 81.18,12.8 JP1.4 79.96,13.87 78.89,12.8 67.31,12.8 | 84.99,20.27 84.99,23.16 84.68,23.47 84.68,24.23 84.99,24.54 85.45,24.54 U1.18 | 88.95,41 92,41 93.22,39.78 93.22,24.08 89.41,20.27 84.99,20.27 | C16.2 16.71,72.39 17.63,71.48 17.63,70.87 16.1,69.34 16.1,68.58 R1.2 15.95,68.58 15.95,64.16 7.72,55.93 10.2 7.72,55.78 7.72,53.34 9.2 | 7.2 7.72,48.31 7.72,50.75 8.2 | 29.21,40.23 24.18,40.23 R13.2 24.03,40.23 14.88,40.23 10.77,44.35 7.72,44.35 | 29.21,40.23 29.52,40.54 29.52,43.13 C9.2 | 29.21,40.23 R15.2 | 4.2 7.72,40.69 7.72,43.13 5.2 7.72,43.28 7.72,44.35 | 7.72,44.35 7.72,45.72 6.2 | v6.65,3.2 7.57,3.2 C5.2 | 17.93,25.6 17.32,25.6 U4.6 | 17.93,25.6 18.24,25.91 18.24,26.67 17.93,26.98 17.32,26.98 U4.4 | JP21.4 19.91,13.56 | 19.91,13.56 19.15,12.8 19.15,9.75 R18.2 | U$1.VCCH 10.92,8.23 10.92,7.62 11.53,7.01 13.51,7.01 14.12,7.62 14.12,9.14 14.43,9.45 18.85,9.45 19,9.6 R18.2 | JP21.4 21.59,15.24 23.27,15.24 24.03,14.48 24.03,13.56 24.79,12.8 28.45,12.8 30.28,14.63 30.28,21.49 29.67,22.1 28.91,22.1 28.45,22.55 28.45,23.62 27.38,24.69 26.01,24.69 U4.18
  Top 0.152: v19.76,23.77 17.93,25.6 | 19.91,13.56 18.24,15.24 14.73,15.24 12.29,12.8 8.33,12.8 7.26,13.87 6.35,13.87 JP22.2 | 20.22,13.87 JP21.4 | 40.79,31.85 41.25,31.85 48.26,38.86 R11.P$2 | 40.79,31.85 40.34,31.85 C3.2 | 30.73,8.08 30.73,5.18 27.38,1.83 19.15,1.83 R19.2 | 30.73,8.08 36.52,13.87 36.83,13.87 JP11.2 36.83,14.02 38.05,15.24 | 40.79,31.85 40.79,27.13 38.05,24.38 38.05,15.24 | 30.73,8.08 29.21,9.6 19.15,9.6 R18.2 | 67.31,12.19 42.93,12.19 39.88,15.24 38.05,15.24
  Bottom 0.152: 53.9,24.23 53.9,18.29 51.77,16.15 | 53.9,24.23 v53.9,24.69 | 51.77,16.15 49.63,14.02 JP10.4 | 53.9,24.23 v51.61,24.23 | v79.35,23.62 79.35,14.63 JP1.4 | 51.77,16.15 53.44,14.48 53.44,13.41 54.05,12.8 66.24,12.8 67.31,13.87 JP3.2 | 7.72,38.1 7.72,36.73 | 7.72,36.73 7.72,35.66 2.2 | 7.72,38.1 7.72,40.54 4.2 | 7.72,38.1 3.2 | 7.2 7.72,48.16 7.72,45.72 6.2 | 9.2 7.72,53.34 7.72,50.9 8.2 | v6.65,3.2 6.65,13.56 6.35,13.87 JP22.2 6.35,14.02 3.91,16.46 3.91,36.12 4.52,36.73 7.72,36.73 | v19.76,23.77 19.76,14.48 20.22,14.02 JP21.4 | JP7.1 66.55,57.15 78.74,69.34 78.74,71.17 79.96,72.39 JP2.1
VCC3.3  (via drill 0.33)
  Top 0.152: 5.89,8.38 5.13,8.38 R12.2 | 5.89,8.38 7.57,8.38 C4.2 | 5.89,8.38 5.89,7.62 | 5.89,7.62 5.89,6.1 5.13,5.33 5.13,4.72 R20.2 5.13,4.57 5.89,3.81 8.18,3.81 8.79,3.2 10.77,3.2 | 14.58,7.16 14.58,7.01 10.77,3.2 | 14.58,7.16 14.58,8.23 U$1.ACC | 10.77,3.2 U$1.VCCL | X1.33 20.07,7.62 19.61,7.16 14.58,7.16 | JP4.1 JP5.1 | 5.89,7.62 v6.04,7.62
  Bottom 0.152: JP5.1 64.57,72.39 63.35,73.61 3.3,73.61 2.54,72.85 2.54,11.12 v6.04,7.62
VIN
  Top 0.152: 3.91,67.51 U$2.2-2 | 8.79,67.51 U$2.2
  Top 1.27: 8.79,67.51 3.91,67.51
  Bottom 1.27: U$2.2 8.89,67.31 8.89,60.96 15.24,54.61 15.24,52.07 19.05,48.26 JP13.5

## Text on the board
tPlace: WildStang Mega Ultra Maxi Board v1.0 Feb 24 2015 | GND | GND | 3.3v | 5v | Vcc | GND | GND | Data | SDA | SDA | Clk | SCL | SCL | Vin | 5v I2C | 3.3v / I2C | GND | 5v | Sig | Vcc | GND | GND | GND | GND | GND | GND | DTR | GND | DTR | GND | DTR